# EAGLE board lcdboard (EAGLE 9.4.2)
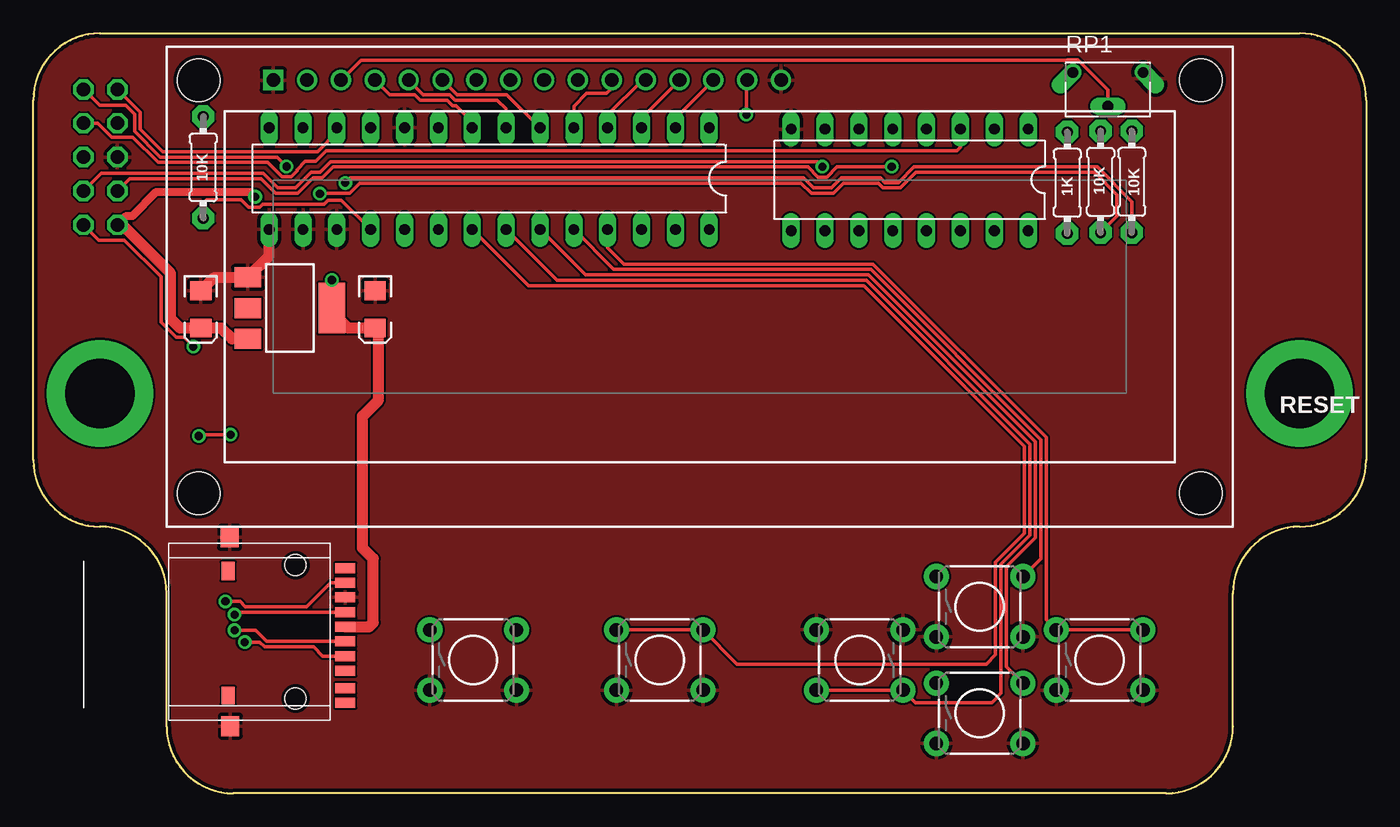
[diagram p0: board, top side]
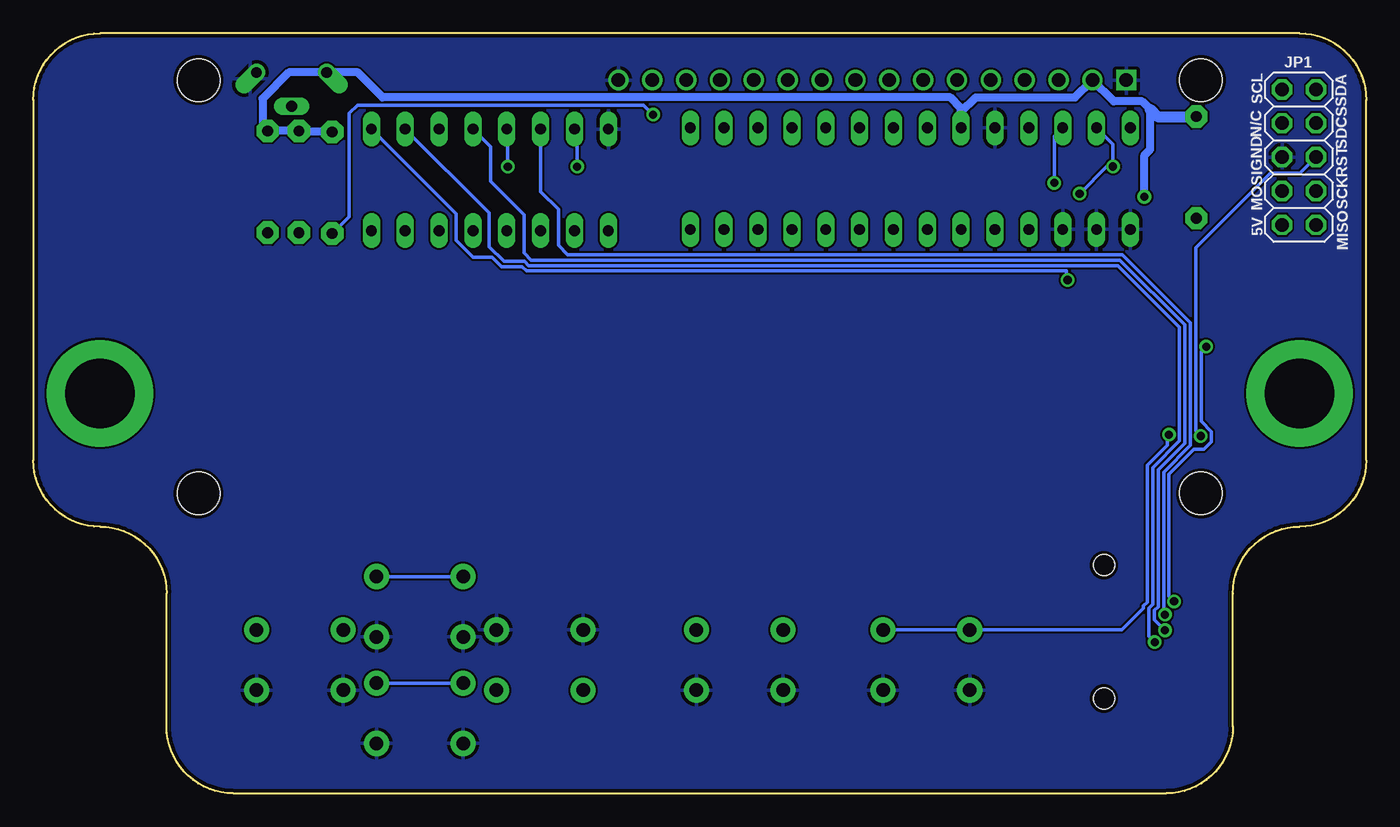
[diagram p1: board, bottom side, seen from below]

Size 100 x 57 mm. Coordinates in mm from the lower left corner, seen from the top.
Outline: 0,25 0,52 arc-90 5,57 95,57 arc-90 100,52 100,25 arc-90 95,20 arc90 90,15 90,5 arc-90 85,0 15,0 arc-90 10,5 10,15 arc90 5,20 arc-90 0,25
Copper layers (1*16): Top 0.035mm / dielectric 1.5mm / Bottom 0.035mm
Design rules "default *": minimum track width 10mil, minimum drill 24mil, track to track 6mil, track to pad 6mil, pad to pad 6mil, via to via 6mil, smd to smd 12mil, copper to edge 10mil, drill to drill 8mil, minimum pad ring 10mil, minimum via ring 8mil, stop-mask expansion 4mil, vias tented up to drill 0mil, thermal gap 10mil
Net classes: 0 default: width 0.254 mm, clearance 0.152 mm; 1 power: clearance 0.152 mm

## Footprints (pad centres in the part's own frame; a part is rotated, then mirrored left to right if it is on the bottom)
EIA3216 = smd 1.4 x 1.6: A 1.4,0; C -1.4,0
DIL28-3 = drill 0.813 long: 1 -16.51,-3.81; 2 -13.97,-3.81; 3 -11.43,-3.81; 4 -8.89,-3.81; 5 -6.35,-3.81; 6 -3.81,-3.81; 7 -1.27,-3.81; 8 1.27,-3.81; 9 3.81,-3.81; 10 6.35,-3.81; 11 8.89,-3.81; 12 11.43,-3.81; 13 13.97,-3.81; 14 16.51,-3.81; 15 16.51,3.81; 16 13.97,3.81; 17 11.43,3.81; 18 8.89,3.81; 19 6.35,3.81; 20 3.81,3.81; 21 1.27,3.81; 22 -1.27,3.81; 23 -3.81,3.81; 24 -6.35,3.81; 25 -8.89,3.81; 26 -11.43,3.81; 27 -13.97,3.81; 28 -16.51,3.81
SOT223 = smd 1.5 x 2: 1 -2.3,-3.15; 2 0,-3.15; 3 2.3,-3.15 | smd 3.8 x 2: 4 0,3.15
DIL16 = drill 0.813 long: 1 -8.89,-3.81; 2 -6.35,-3.81; 3 -3.81,-3.81; 4 -1.27,-3.81; 5 1.27,-3.81; 6 3.81,-3.81; 7 6.35,-3.81; 8 8.89,-3.81; 9 8.89,3.81; 10 6.35,3.81; 11 3.81,3.81; 12 1.27,3.81; 13 -1.27,3.81; 14 -3.81,3.81; 15 -6.35,3.81; 16 -8.89,3.81
2X05 = drill 1.016 octagon: 1 -5.08,-1.27; 2 -5.08,1.27; 3 -2.54,-1.27; 4 -2.54,1.27; 5 0,-1.27; 6 0,1.27; 7 2.54,-1.27; 8 2.54,1.27; 9 5.08,-1.27; 10 5.08,1.27
LCD-16X2-4HOLES = drill 1.016 square: 1 -32,15.5 | drill 1.016: 2 -29.46,15.5; 3 -26.92,15.5; 4 -24.38,15.5; 5 -21.84,15.5; 6 -19.3,15.5; 7 -16.76,15.5; 8 -14.22,15.5; 9 -11.68,15.5; 10 -9.14,15.5; 11 -6.6,15.5; 12 -4.06,15.5; 13 -1.52,15.5; 14 1.02,15.5; 15 3.56,15.5; 16 6.1,15.5 | hole 3.2: -37.6,15.5; -37.6,-15.5; 37.6,-15.5; 37.6,15.5
0204/7 = drill 0.813 pad 1.676 octagon: 1 -3.81,0; 2 3.81,0
POT_B64W = drill 0.813 offset: A 2.64,0; E -2.64,0 | drill 0.813 long: S 0,-2.54
TACTILE-PTH = drill 1.016 pad 1.88: 1 -3.251,2.261; 2 3.251,2.261; 3 -3.251,-2.261; 4 3.251,-2.261
USD-SOCKET-PP = smd 0.75 x 1.5: 1 2.925,1.125; 2 1.825,1.125; 3 0.725,1.125; 4 -0.375,1.125; 5 -1.475,1.125; 6 -2.575,1.125; 7 -3.675,1.125; 8 -4.775,1.125; CD1 5.325,1.125; CD2 4.225,1.125 | smd 1.4 x 1: CDNC1 -4.55,-7.65 | smd 1.3 x 1: CDNC2 4.775,-7.65 | smd 1.5 x 1.35: GND1 -7.075,-7.55; GND2 7.075,-7.5 | hole 1.6: -5,-2.6; 5,-2.6

## Placement (x,y rotation side)
C2  10uF  [EIA3216]  12.57,36.29 270 top
C6  10uF  [EIA3216]  25.64,36.29 270 top
IC1  MCP23017SP  [DIL28-3]  34.2,46.1 180 top
IC3  1117-33  [SOT223]  19.24,36.39 270 top
IC5  4050N  [DIL16]  65.75,46.01 180 top
JP1  [2X05]  5.04,47.72 90 bottom
LCD16  LCD-HD447804-HOLES16X2-4-HOLES  [LCD-16X2-4HOLES]  50,38 0 top
R1  [0204/7]  80.07,45.87 270 top
R2  [0204/7]  82.41,45.87 90 top
R3  [0204/7]  12.75,46.95 90 top
R6  [0204/7]  77.57,45.79 90 top
RP1  BOURNS 3362-S-1-103LF  [POT_B64W]  80.62,54.07 0 top
S1  RESET  [TACTILE-PTH]  33,10 0 top
S2  RESET  [TACTILE-PTH]  80,10 0 top
S3  RESET  [TACTILE-PTH]  71,14 0 top
S4  RESET  [TACTILE-PTH]  71,6 0 top
S5  RESET  [TACTILE-PTH]  62,10 180 top
S6  RESET  [TACTILE-PTH]  47,10 0 top
U2  USD-SOCKETUSD  [USD-SOCKET-PP]  22.27,12.12 270 top

## Library data of the parts
C2 C6 S1-S6 = SparkFun
IC1 R1-R3 R6 = adafruit
IC3 = v-reg
IC5 = 40xx
JP1 = pinhead
LCD16 = HD44780LCD
RP1 = presetpot
U2 = SparkFun-Connectors_PETERMICROSDEBAY

## Nets
3V3SD: C6.A IC3.4 IC5.1 U2.4
5V: C2.A IC1.9 IC3.3 JP1.2 LCD16.2 R1.1 R2.2 R3.2 R6.2 RP1.E
A5: IC1.26
A6: IC1.27
A7: IC1.28
BL: IC1.1
CS: IC5.2 U2.2
DB4: IC1.5 LCD16.11
DB5: IC1.4 LCD16.12
DB6: IC1.3 LCD16.13
DB7: IC1.2 LCD16.14
DI: IC5.4 U2.3
DO: JP1.1 U2.7
E: IC1.6 LCD16.6
GND: C2.C C6.C IC1.10 IC1.15 IC1.16 IC1.17 IC3.1 IC5.8 JP1.6 LCD16.1 LCD16.16 RP1.A S1.3 S1.4 S2.3 S2.4 S3.3 S3.4 S4.3 S4.4 S5.3 S5.4 S6.3 S6.4 U2.6 U2.GND1 U2.GND2
MCURESET: JP1.5 S1.1 S1.2
MOSI: IC5.5 JP1.4
N$1: LCD16.3 RP1.S
N$2: LCD16.15 R6.1
N$3: JP1.8
N$7: IC1.19
N$8: IC1.20
P1: IC1.25 S2.1 S2.2
P2: IC1.24 S3.1 S3.2
P3: IC1.23 S4.1 S4.2
P4: IC1.22 S5.1 S5.2
P5: IC1.21 S6.1 S6.2
RESET: IC1.18 R3.1
RS: IC1.8 LCD16.4
RW: IC1.7 LCD16.5
SC: IC5.6 U2.5
SCK: IC5.7 JP1.3
SCL: IC1.12 JP1.10 R2.1
SDA: IC1.13 JP1.9 R1.2
SDS: IC5.3 JP1.7

## Tracks (layer width: path | path; a pad name or v marks a point on that pad's centre or on a via)
3V3SD  (via drill 0.61)
  Top 0.254: v22.4,38.5 22.4,36.11 22.39,36.11
  Top 0.813: IC3.4 22.39,36.11 23.61,34.89 C6.A 25.9,34.63 25.9,29.5 24.7,28.3 24.7,18.4 25.5,17.6 25.5,12.8 25.19,12.49 U2.4
  Bottom 0.254: IC5.1 68.3,43.49 68.3,41.5 67,40.2 65.58,40.2 64.87,39.49 63.32,39.49 63.01,39.18 22.5,39.18 22.5,38.6 v22.4,38.5
5V  (via drill 0.61)
  Top 0.61: JP1.2 6.98,43.32 7.44,43.32 9.23,45.1 16.28,45.1 v16.64,44.74
  Top 0.813: IC3.3 14.91,34.09 14.1,34.9 C2.A 11.01,34.89 10.3,35.6 10.3,39 6.66,42.64 JP1.2
  Bottom 0.61: v16.64,44.74 16.64,47.86 16.2,48.3 16.2,51.3 16.8,51.9 18.94,51.9 LCD16.2 21.84,52.2 29.3,52.2 30.39,51.11 IC1.9 30.39,51.39 31.2,52.2 73.8,52.2 75.67,54.07 RP1.E 80.83,54.07 82.8,52.1 82.8,50.06 R2.2 R1.1 80,49.6 R6.2
  Bottom 0.813: 16.2,51.3 15.66,50.76 R3.2
CS  (via drill 0.61)
  Top 0.254: v15.86,11.34 16.99,11.34 17.34,10.98 21.02,10.98 21.71,10.29 U2.2
  Bottom 0.254: IC5.2 65.8,43.53 65.8,41 64.7,39.9 63.15,39.9 62.84,39.59 18.64,39.59 14.01,34.96 14.01,26.44 16.01,24.44 16.01,14.18 16.29,13.89 16.29,11.77 v15.86,11.34
DB4
  Top 0.254: IC1.5 40.55,51.55 41.5,52.5 43,52.5 43.4,52.9 LCD16.11
DB5
  Top 0.254: IC1.4 43.09,50.89 45.7,53.5 LCD16.12
DB6
  Top 0.254: IC1.3 45.63,50.65 LCD16.13
DB7
  Top 0.254: IC1.2 48.17,50.65 LCD16.14
DI  (via drill 0.61)
  Top 0.254: v15.1,12.23 16.67,12.23 17.51,11.39 U2.3
  Bottom 0.254: IC5.4 65.7,48.51 65.7,45.9 63.2,43.4 63.2,40.52 62.67,39.99 18.47,39.99 13.61,35.13 13.61,26.27 15.61,24.27 15.61,14.01 15.89,13.73 15.89,13.02 v15.1,12.23
DO  (via drill 0.61)
  Top 0.254: JP1.1 4.91,41.5 6.83,41.5 9.6,38.73 9.6,35.33 10.72,34.21 11.3,34.21 v12.01,33.5 | v14.41,14.4 15.5,14.4 15.9,14 20.5,14 22.29,15.79 U2.7
  Bottom 0.254: v12.01,33.5 12.39,33.12 12.39,27.89 11.62,27.13 11.62,26.38 12.2,25.8 12.93,25.8 14.79,23.93 14.79,14.78 v14.41,14.4
E
  Top 0.254: IC1.6 35.52,52.4 31.8,52.4 LCD16.6
GND
  Top 0.813: C2.C 13.57,38.69 IC3.1 17.69,40.29 IC1.15
  pour Top (rank 6): 0,57 0,-1 101,-1 101,56 100,57
  pour Bottom (rank 6): 0,57 0,-1 101,-1 101,56 100,57
MCURESET  (via drill 0.61)
  Top 0.254: v14.8,26.9 12.51,26.9 v12.41,26.8
  Bottom 0.254: S1.2 S1.1 18.34,12.26 16.7,13.9 16.7,14.06 16.42,14.34 16.42,24.61 14.92,26.11 14.92,26.78 v14.8,26.9 | v12.41,26.8 12.79,27.18 12.79,40.91 7.2,46.5 4.99,46.5 JP1.5
MOSI  (via drill 0.61)
  Top 0.254: JP1.4 7.22,46.09 17.08,46.09 18.17,45.01 19.83,45.01 21,46.17 21.67,46.17 22.48,46.98 58.11,46.98 58.87,46.22 59.53,46.22 60.3,46.99 64.38,46.99 v64.4,47.01
  Bottom 0.254: v64.4,47.01 64.4,49.75 IC5.5
N$1
  Top 0.254: LCD16.3 24.58,55 77.58,55 77.59,55.01 78.37,55.01 80.62,52.76 RP1.S
N$2  (via drill 0.61)
  Top 0.254: v53.5,50.9 53.5,53.44 LCD16.15
  Bottom 0.254: R6.1 76.3,43.26 76.3,51 75.68,51.62 54.22,51.62 v53.5,50.9
N$5  (via drill 5.2 pad 8)
  other vias: 5,30
N$9  (via drill 5.2 pad 8)
  other vias: 95,30
P1
  Top 0.254: IC1.25 43.09,40.91 44.3,39.7 63,39.7 76,26.7 76,13.01 S2.1 S2.2
P2
  Top 0.254: IC1.24 43.55,39.29 62.83,39.29 75.59,26.53 75.59,17.6 S3.2
  Bottom 0.254: S3.1 S3.2
P3
  Top 0.254: IC1.23 41.41,38.89 62.66,38.89 75.19,26.36 75.19,19.19 73,17 73,9.51 S4.2
  Bottom 0.254: S4.1 S4.2
P4
  Top 0.254: IC1.22 39.28,38.48 62.49,38.48 74.78,26.2 74.78,19.36 72.59,17.17 72.59,7.49 71.9,6.8 66.19,6.8 S5.1 S5.2
P5
  Top 0.254: IC1.21 37.15,38.07 62.33,38.07 74.37,26.03 74.37,19.52 72.19,17.34 72.19,10.39 71.5,9.7 52.81,9.7 S6.2 S6.1
RESET
  Top 0.254: IC1.18 23.1,44.5 22.13,44.5 21.83,44.19 17.21,44.19 16.97,43.96 16.14,43.96 15.58,44.52 13.02,44.52 12.7,44.2 12.7,43.18 R3.1
RS
  Top 0.254: IC1.8 32.93,50.37 31.71,51.59 31.46,51.59 31.06,51.99 29.01,51.99 28.6,52.4 26.72,52.4 LCD16.4
RW
  Top 0.254: IC1.7 35.47,51.33 34.81,51.99 31.63,51.99 31.23,52.4 29.26,52.4 LCD16.5
SC  (via drill 0.61)
  Top 0.254: v15.1,13.4 15.29,13.59 U2.5
  Bottom 0.254: IC5.6 61.94,45.14 60.6,43.8 60.6,41.1 59.91,40.41 18.31,40.41 13.2,35.3 13.2,26.1 15.2,24.1 15.2,13.5 v15.1,13.4
SCK  (via drill 0.61)
  Top 0.254: JP1.3 5.09,46.5 17.25,46.5 18.34,45.41 19.66,45.41 20.83,46.58 21.5,46.58 22.31,47.39 58.82,47.39 v59.2,47.01
  Bottom 0.254: v59.2,47.01 59.2,49.63 IC5.7
SCL  (via drill 0.61)
  Top 0.254: IC1.12 22.77,49.57 21.33,48.13 9.7,48.13 8.01,49.82 8.01,51.1 JP1.10 | R2.1 82.41,44.39 79.82,46.98 66.06,46.98 64.89,45.81 63.91,45.81 63.56,46.16 60.62,46.16 59.86,45.41 58.54,45.41 57.77,46.17 23.78,46.17 v23.4,45.79
  Bottom 0.254: v23.4,45.79 23.4,49.28 IC1.12
SDA  (via drill 0.61)
  Top 0.254: JP1.9 4.96,51.6 6.93,51.6 7.6,50.93 7.6,49.65 9.53,47.72 18.29,47.72 v19,47.01 | R1.2 81.3,43.28 81.3,44.9 79.63,46.57 66.23,46.57 65.06,45.41 63.74,45.41 63.39,45.75 60.78,45.75 60.03,45 58.37,45 57.61,45.76 24.49,45.76 23.73,45 21.52,45 v21.5,44.98
  Bottom 0.254: IC1.13 19,48.68 v19,47.01 19.47,47.01 v21.5,44.98
SDS
  Top 0.254: JP1.7 4.83,50.26 5.88,49.22 7.46,49.22 9.36,47.31 17.59,47.31 18.67,46.23 19.33,46.23 19.79,46.69 19.79,46.78 20.4,47.39 21.17,47.39 21.98,48.2 69.3,48.2 69.56,48.46 IC5.3

## Text on the board
tPlace: 10K | 1K | 10K | 10K | RESET
bPlace: SDA | SDCS | SCL | RST | N/C | GND | SCK | MISO | MOSI | 5V
OPENHWSILK: LCD | I2C | 5V | VCC | 3DP | NB: OR not AND | 220R | 4K7 | 4K7 | MCP23017 | RPi | 3.3V | I2C Pullup Voltage | CONTRAST | 3DP | 10k | 3V3 | SDA | SCL | 0.1u | CS/ | SDS | RST | GND | 0.1u | SCK | MOSI | SD CARD | MISO | 5V | 4050 | CONNECTOR | ON REVERSE | RPi | LEDR | LEDR | RESET | MENU | BACK | ENTER | PWR | SD